# Altium PCB MOSFET out.PcbDoc
Units mm, origin at the board's own origin, x right, y up, seen from the top; angles counter-clockwise.
Board outline 24.13 x 30.48 mm, 2 copper layers (Top Layer, Bottom Layer); 11 components, 8 nets, 44 pads, 65 vias.
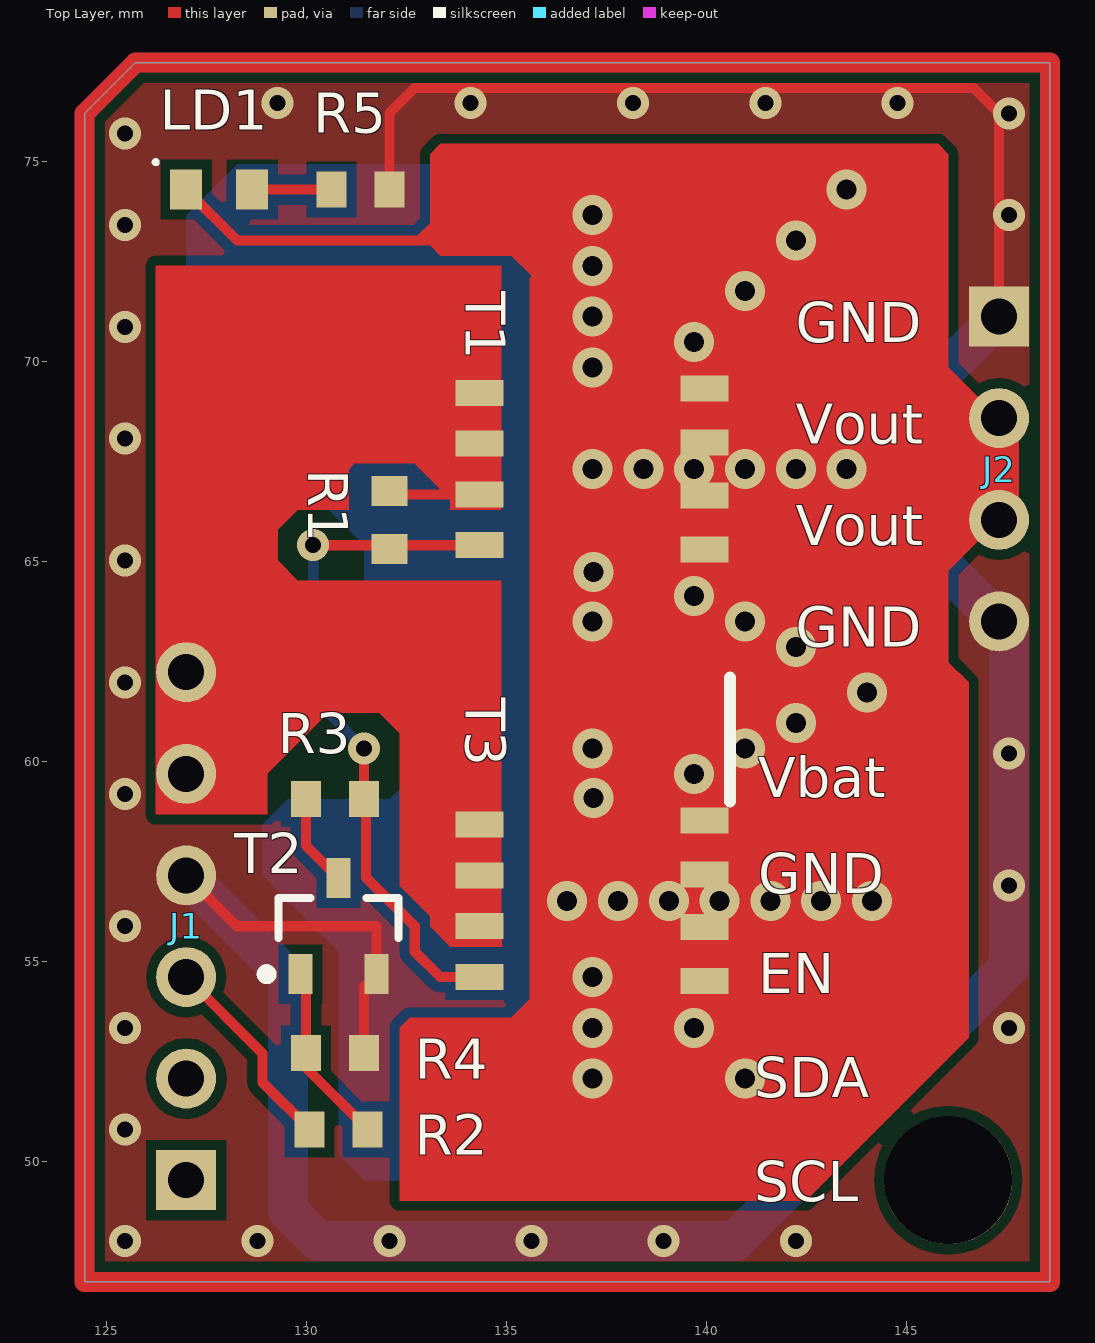
[diagram p0: Top Layer view]
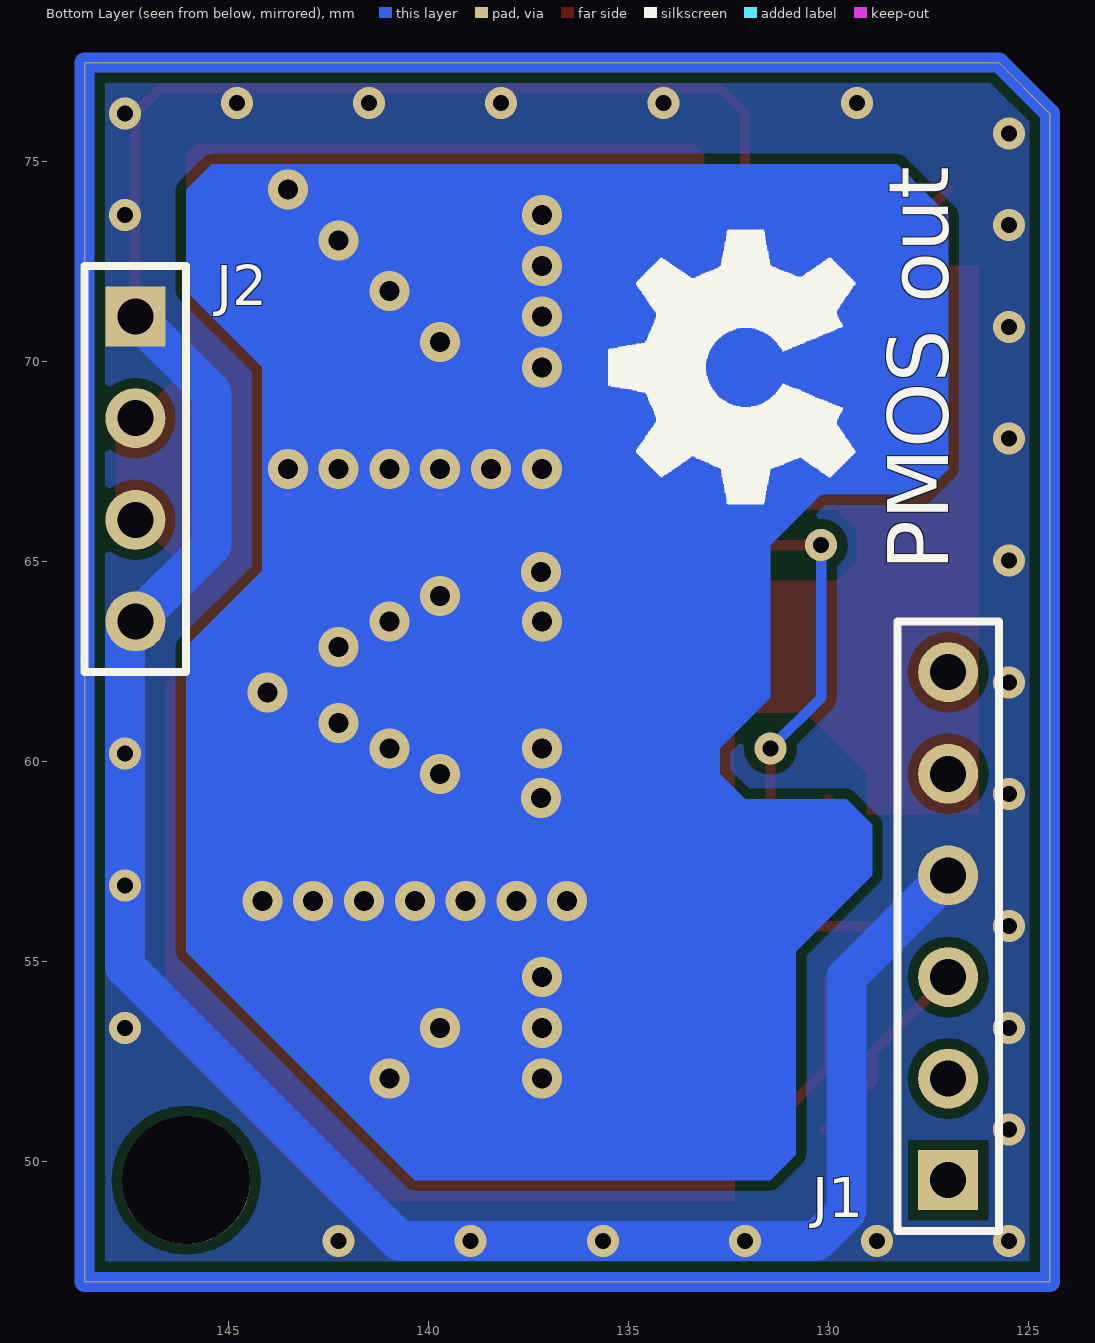
[diagram p1: Bottom Layer view, seen from below]
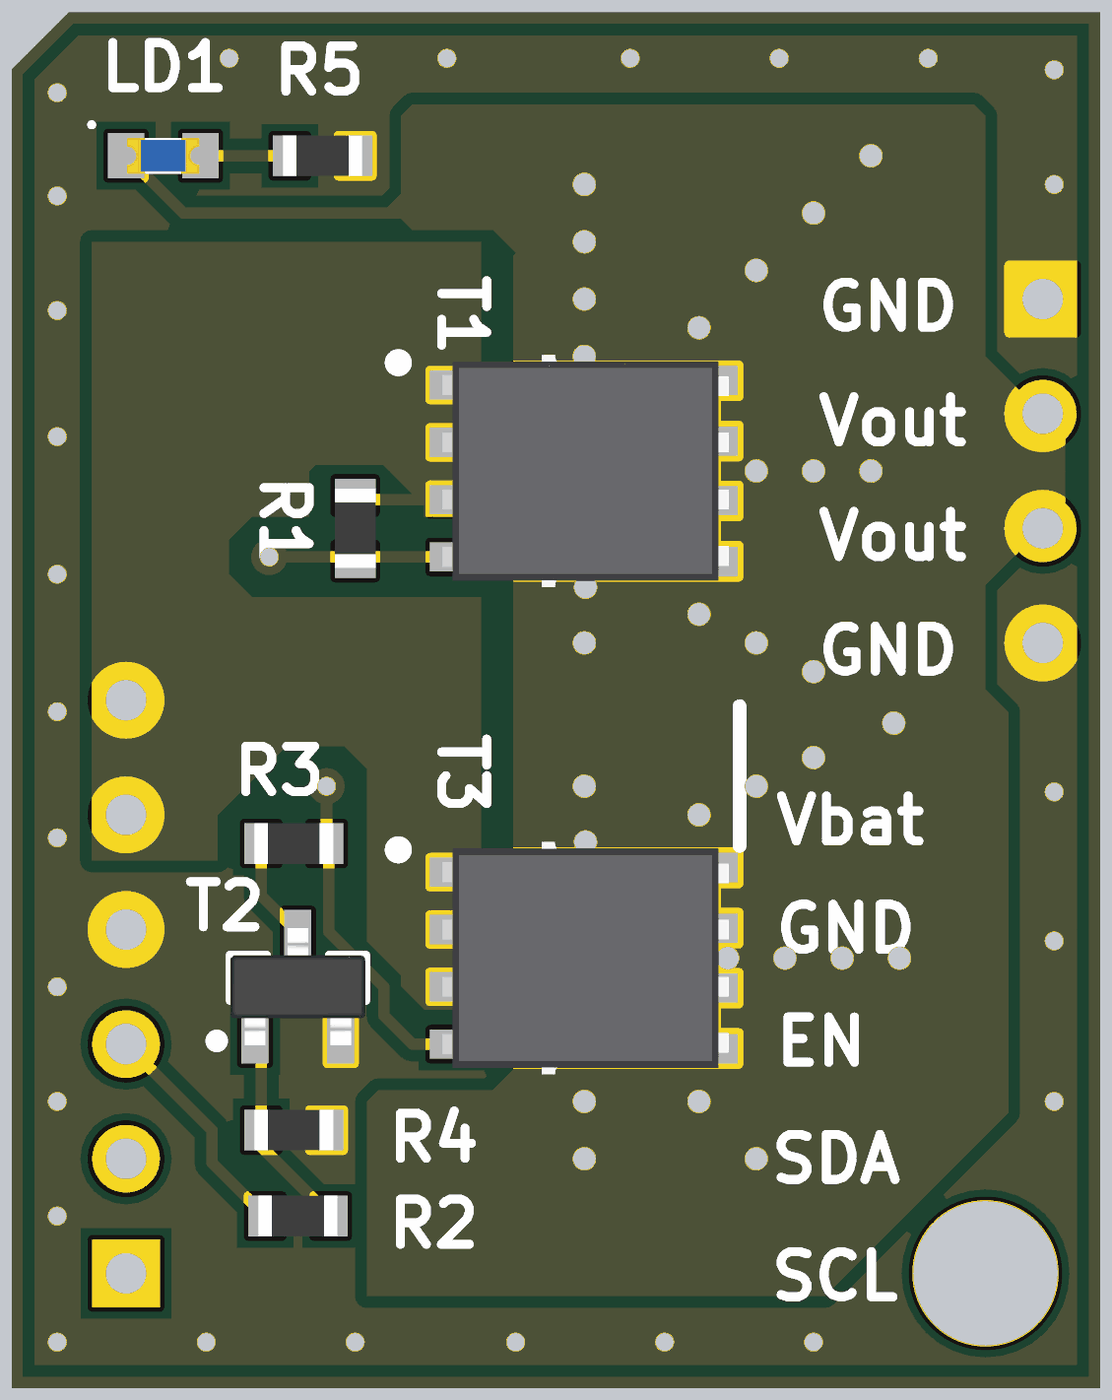
[diagram p2: 3D render of the assembled board from above, using the file's embedded part models]

## Layer stack, top to bottom
Top Solder: solder mask 0.0102, Solder Resist, Dk 3.5
Top Layer: signal copper 0.0356
Dielectric 1: dielectric 0.32, FR-4, Dk 4.8
Bottom Layer: signal copper 0.0356
Bottom Solder: solder mask 0.0102, Solder Resist, Dk 3.5

## Board outline
124.46,46.99 124.46,76.2 125.73,77.47 148.59,77.47 148.59,46.99

## Design rules (kind name [scope] priority, off if disabled: settings)
Clearance [All] p1: gap=0.254 ignorepadtopadclearanceinfootprint=FALSE except(0: Arc-Hole Track-Hole SMDPad-Hole THPad-Hole Via-Hole Fill-Hole Poly-Hole Region-Hole Text-Hole)
PlaneConnect PlaneConnect_gnd [InNet('GND')] p1: planeconnectstyle=Direct reliefexpansion=0.508 reliefentries=4 reliefconductorwidth=0.254 reliefairgap=0.254
PlaneConnect [All] p2: planeconnectstyle=Relief reliefexpansion=0.508 reliefentries=4 reliefconductorwidth=0.5 reliefairgap=0.254
PolygonConnect PolygonConnect_gnd [InNet('GND')] p1: connectstyle=Direct reliefconductorwidth=0.254 reliefentries=4 polygonreliefangle="90 Angle" airgapwidth=0.254
PolygonConnect [All] p2: thpad.connectstyle=Relief thpad.reliefconductorwidth=0.254 thpad.reliefentries=4 thpad.polygonreliefangle="90 Angle" thpad.airgapwidth=0.254 smdpad.connectstyle=Relief smdpad.reliefconductorwidth=0.254 smdpad.reliefentries=4 smdpad.polygonreliefangle="90 Angle" smdpad.airgapwidth=0.254 via.connectstyle=Direct via.reliefconductorwidth=0.254 via.reliefentries=4 via.polygonreliefangle="90 Angle" via.airgapwidth=0.254
RoutingVias [All] p1: holewidth=0.4 width=0.8 viastyle="Through Hole" minholewidth=0.3 minwidth=0.6 maxholewidth=1 maxwidth=3
SolderMaskExpansion [All] p1: expansion=0.102
Width [All] p1: maxlimit=5 minlimit=0.254 preferedwidth=1 minimp=50.000000 maximp=50.000000 favimp=50.000000
29 further rules are at their usual default settings.

## Components (designator, comment, footprint, x,y, rotation, side; value= is the part's Value field where it differs from the comment)
J1 "Uin" HDR1X6 127,49.53 r90 top
J2 "Uout" HDR1X4 147.32,71.12 r270 top
LD1 "LED diode" LED_0603 127.825,74.295 r0 top
R1 "Resistor generic" "0603 RES" 132.08,66.04 r90 top
R2 "Resistor generic" "0603 RES" 130.81,50.8 r180 top
R3 "Resistor generic" "0603 RES" 130.72,59.055 r180 top
R4 "Resistor generic" "0603 RES" 130.72,52.705 r0 top
R5 "Resistor generic" "0603 RES" 131.355,74.295 r180 top
T1 "MOSFET-P" TDSON-8 137.16,67.31 r270 top
T2 "MOSFET-N" SOT23 130.81,55.88 r90 top
T3 "MOSFET-P" TDSON-8 137.16,56.515 r270 top

## Footprints (in the part's own frame and the unit in brackets; to place one, negate y for a bottom-side part, rotate by r counter-clockwise, add the part's x,y. Pads: shape width x height; smd on the part's side, far side on the other; paste and mask are expansions set on the pad)
"0603 RES" [mm] "RES0603 medium"
  rect 0.75x0.9 smd: 1(-0.725,0) 2(0.725,0)
  body extent -0.87,-0.45 0.87,0.45, height 0.4
HDR1X4 [mm] "Connector; Header; 4 Position"
  rect 1.5x1.5 hole 0.9: 1(0,0)
  round 1.5 hole 0.9: 2(2.54,0) 3(5.08,0) 4(7.62,0)
HDR1X6 [mm] "Connector; Header; 6 Position"
  rect 1.5x1.5 hole 0.9: 1(0,0)
  round 1.5 hole 0.9: 2(2.54,0) 3(5.08,0) 4(7.62,0) 5(10.16,0) 6(12.7,0)
LED_0603 [mm] "LED diode 0603"
  rect 0.8x1 smd: 1(-0.825,0) 2(0.825,0)
  silkscreen extent -1.64,0.64 -1.54,0.74, body extent -0.8,-0.4 0.8,0.4, height 0.6
SOT23 [mm] "SOT23, 3-Leads, Body 2,90x2,45mm, Pitch 0,95mm, IPC Medium Density"
  rect 1x0.6 smd: 1(-1.2,0.95) 2(-1.2,-0.95) 3(1.2,0)
  silkscreen extent -1.32,-1.5 0.7,1.92, body extent -1.3,-1.5 1.3,1.5, height 1.1
TDSON-8 [mm] "Mosfet TDSON 8-pin"
  rect 0.65x1.2 smd: 1(-1.905,-2.825) 1(-0.635,-2.825) 1(0.635,-2.825) 2(1.905,-2.825) 3(-2.007,2.794) 3(-0.66,2.794) 3(0.66,2.794) 3(2.007,2.794)
  round 0.6 on Top Overlay: ""(-2.4,-4.125)
  Top Layer region: 0.315,2.925 1.015,2.925 1.015,3.425 0.315,3.425
  Top Layer region: -1.015,2.925 -0.315,2.925 -0.315,3.425 -1.015,3.425
  Top Layer region: 1.65,2.925 2.35,2.925 2.35,3.425 1.65,3.425
  Top Layer region: -2.35,2.925 -1.65,2.925 -1.65,3.425 -2.35,3.425
  Top Layer region: -2.35,2.925 -2.35,-1.575 2.35,-1.575 2.35,2.925
  body extent -2.58,-3.15 2.57,3.2, height 1.1

## Part data
J1: library part "Header 6", "Header, 6-Pin", LatestRevisionDate=17-Jul-2002, LatestRevisionNote="Re-released for DXP Platform.", Publisher="Altium Limited"
J2: library part "Header 4", "Header, 4-Pin", LatestRevisionDate=17-Jul-2002, LatestRevisionNote="Re-released for DXP Platform.", Publisher="Altium Limited"
LD1: "LED"
R1 R2 R3 R4 R5: library part Resistor, "Resistor SMD"
  R1 R4: Valve=100k
  R2 R3: Valve=100
  R5: Valve=470
T1 T3: "MOSFET P"
T2: "MOSFET N"

## Free pads (board coordinates)
  round 3.2 hole 3.2: 10(146.05,49.53)

## Via types
v1: diameter 1, hole 0.5, Top Layer to Bottom Layer, tented both sides, 37 vias
v2: diameter 0.8, hole 0.4, Top Layer to Bottom Layer, tented both sides, 28 vias

## Nets (pads, with @x,y where several pads share a name; then routed paths per layer and width w, separated by ;. In a path a pad name is that pad's centre, name@x,y a point inside that pad or via, vN(x,y) a via of type N, cw(c..) or ccw(c..) an arc to the next point about the centre after c; other vN are vias at no path point)
+VBAT: J1.5 J1.6 R1.2 T1.1 T3.1 | length 28.2
  Top Layer w0.254: R1.2 132.17,66.675 T1.1@134.335,66.675
  Top Layer w1: J1.5 J1.6 ; T3.1@134.335,57.15 134.335,58.42 134.335,59.975 132.08,62.23 J1.6 ; T1.1@134.335,67.945 128.27,67.945 127,66.675 J1.6
GND: J1.4 J2.1 J2.4 R4.2 R5.1 T2.2 | length 79.9
  Top Layer w0.254: J1.4 128.27,55.88 131.76,55.88 T2.2 131.445,54.365 R4.2 ; R5.1 132.08,76.2 132.715,76.835 141.478,76.835 146.685,76.835 147.32,76.2 J2.1
  Bottom Layer w1: J1.4 129.54,54.61 129.54,48.768 130.302,48.006 v2(132.08,48.006) v2(135.636,48.006) v2(138.938,48.006) 140.716,48.006 147.574,54.864 v2(147.574,56.896) v2(147.574,60.198) 147.574,63.246 J2.4 145.415,65.405 145.415,69.215 J2.1
  other v2: 125.476,48.006 128.778,48.006 142.24,48.006 125.476,50.8 125.476,53.34 147.574,53.34 125.476,55.88 125.476,59.182 125.476,61.976 125.476,65.024 125.476,68.072 125.476,70.866 125.476,73.406 147.574,73.66 125.476,75.692 147.574,76.2 129.286,76.454 134.112,76.454 138.176,76.454 141.478,76.454 144.78,76.454
NetJ1_3: J1.3 R2.2 | length 5.1
  Top Layer w0.254: J1.3 128.905,52.705 128.905,51.98 R2.2
NetJ2_2: J2.2 J2.3 LD1.1 T1.3 T3.3 | length 39.7
  Top Layer w0.254: LD1.1 128.27,73.025 132.842,73.025 ; 133.223,73.406 132.842,73.025 ; 137.795,67.31 137.795,71.755 v1(137.16,72.39) 136.525,73.025 132.842,73.025
  Top Layer w1: v1(137.795,56.515) 137.795,67.31 v1(138.43,67.31) v1(139.7,67.31) v1(140.97,67.31) v1(142.24,67.31) v1(143.51,67.31) 147.32,67.31 ; J2.3 147.32,67.31 ; J2.2 147.32,67.31
  other v1: 137.16,52.07 140.97,52.07 137.16,53.34 139.7,53.34 137.16,54.61 136.525,56.515 139.065,56.515 140.335,56.515 141.605,56.515 142.875,56.515 144.145,56.515 137.185,59.09 139.7,59.69 137.16,60.325 140.97,60.325 142.24,60.96 144.018,61.722 142.24,62.865 137.16,63.5 140.97,63.5 139.7,64.135 137.185,64.735 137.16,67.31 137.16,69.85 139.7,70.485 137.16,71.12 140.97,71.755 142.24,73.025 137.16,73.66 143.51,74.295
NetLD1_2: LD1.2 R5.2 | length 2
  Top Layer w0.254: LD1.2 R5.2
NetR1_1: R1.1 R3.1 T1.2 T3.2 | length 17.4
  Top Layer w0.254: v2(130.175,65.405) R1.1@132.17,65.405 ; v2(131.445,60.325) R3.1 131.491,59.009 131.491,57.104 132.715,55.88 132.715,55.245 133.35,54.61 T3.2 ; R1.1 R1.1@132.17,65.405 ; T1.2 R1.1@132.17,65.405
  Bottom Layer w0.254: v2(130.175,65.405) 130.175,61.595 v2(131.445,60.325)
NetR2_1: R2.1 R4.1 T2.1 | length 4.6
  Top Layer w0.254: T2.1 129.995,54.545 R4.1 129.995,52.34 R2.1
NetR3_2: R3.2 T2.3 | length 2.3
  Top Layer w0.254: R3.2 129.995,57.895 T2.3
pads on no net: J1.1 J1.2 T1. T3.

## Polygon pours and split planes (outlines as drawn)
GND on Top Layer "GND" (solid, remove dead copper, pour order 2): 124.46,46.99 124.46,76.2 125.73,77.47 148.59,77.47 148.59,46.99
GND on Bottom Layer "GND" (solid, remove dead copper, pour order 3): 124.46,46.99 124.46,76.2 125.73,77.47 148.59,77.47 148.59,46.99

## Other copper
Top Layer:
  region net +VBAT: 134.874,66.294 133.604,66.294 133.604,66.548 132.588,67.564 128.27,67.564 127.254,66.548 126.238,66.548 126.238,72.39 134.874,72.39
  region net +VBAT: 134.874,55.626 134.874,64.516 129.794,64.516 129.286,65.024 129.286,67.564 126.238,67.564 126.238,58.674 129.032,58.674 129.032,59.69 130.556,61.214 133.096,61.214
  region net +VBAT: 134.897,55.372 133.604,55.372 133.096,55.88 133.096,56.134 132.334,56.896 132.334,59.944 132.334,60.706 131.826,61.214 134.366,61.214
  region net +VBAT: 129.032,65.786 129.286,65.786 129.794,66.294 131.064,66.294 131.064,67.31 131.318,67.564 129.032,67.564
  region net NetJ2_2: 135.585,54.051 135.128,53.594 132.588,53.594 132.334,53.34 132.334,49.022 142.494,49.022 146.558,53.086 146.558,61.976 146.05,62.484 146.05,64.77 147.32,66.04 147.32,68.58 146.05,69.85 146.05,75.184 145.796,75.438 133.35,75.438 133.096,75.184 133.096,72.898 133.35,72.644 135.128,72.644 135.636,72.136 135.585,72.085
Bottom Layer:
  region net NetJ2_2: 131.445,49.53 140.335,49.53 146.05,55.245 146.05,62.865 144.145,64.77 144.145,69.85 146.05,71.755 146.05,74.295 145.415,74.93 128.27,74.93 127,73.66 127,67.31 127.635,66.675 130.175,66.675 131.445,65.405 131.445,61.595 132.715,60.325 132.715,59.69 132.08,59.055 129.54,59.055 128.905,58.42 128.905,57.15 130.81,55.245 130.81,50.165
Multi-Layer:
  the board outline again, w0.5

## Silkscreen, mask and mechanical layers (free items; w line width, h text height)
Top Overlay:
  lines w0.3: 140.6,59 140.6,62.1
  text "GND" at 142.24,70.485 h1
  text "Vout" at 142.24,67.945 h1
  text "Vout" at 142.24,65.405 h1
  text "GND" at 142.24,62.865 h1
  text "Vbat" at 141.3,59.1 h1
  text "GND" at 141.3,56.7 h1
  text "EN" at 141.3,54.2 h1
  text "SDA" at 141.2,51.6 h1
  text "SCL" at 141.2,49 h1
Bottom Overlay:
  region: 1925 vertices and 0 holes, not listed, extent 129.329,66.427 135.494,73.292
  text "PMOS out" at 127,64.77 h1.52 r270